# EAGLE board Myboard (EAGLE 8.2.2)
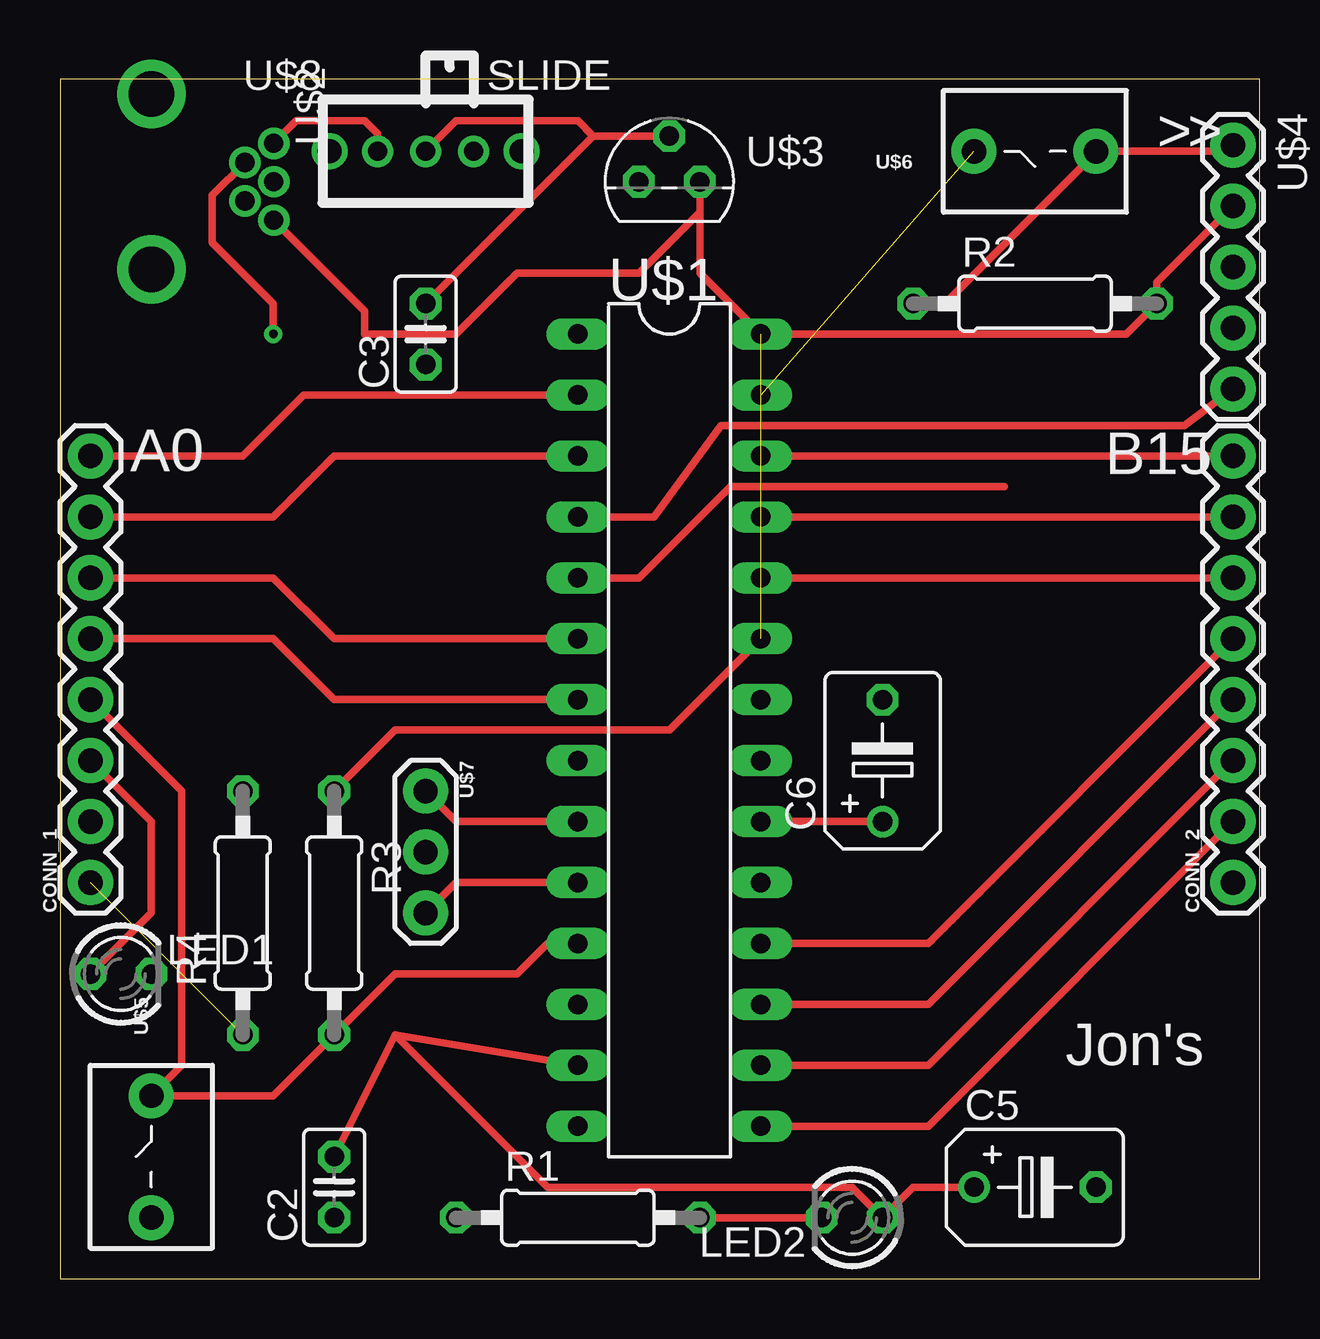
[diagram p0: board, top side]
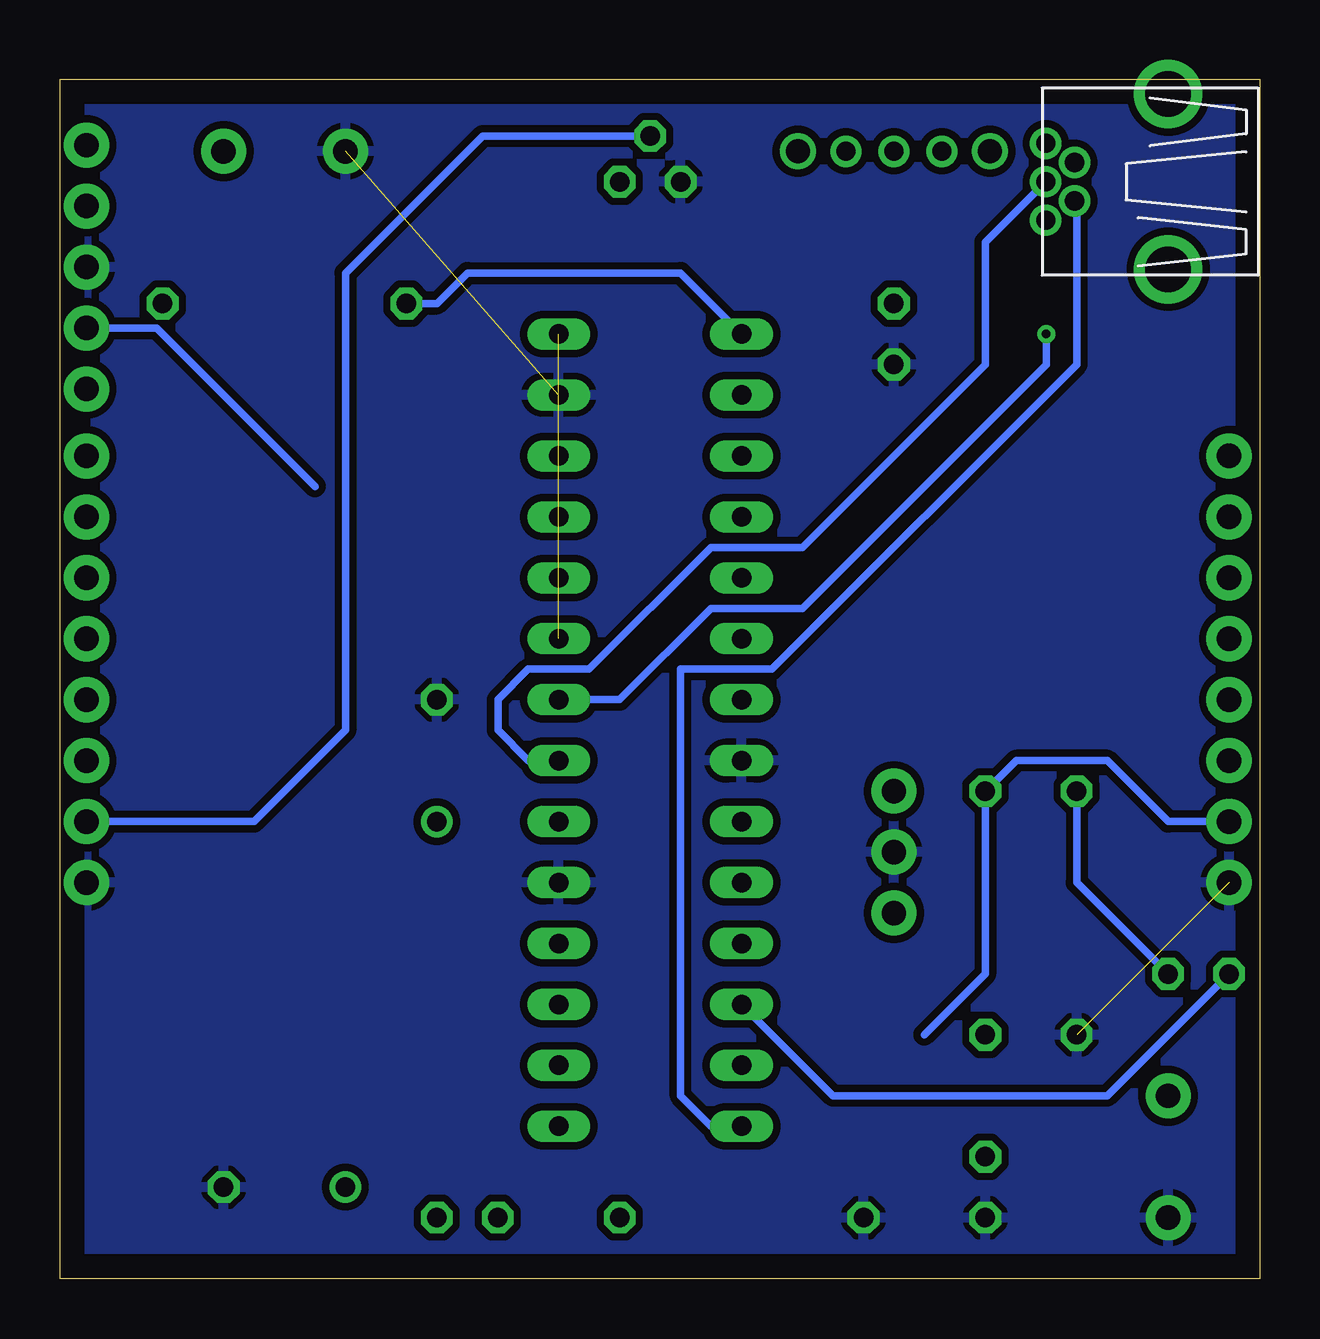
[diagram p1: board, bottom side, seen from below]

Size 50 x 50 mm. Coordinates in mm from the lower left corner, seen from the top.
Outline: 0,0 50,0 50,50 0,50 0,0
Copper layers (1*16): Top 0.035mm / dielectric 1.5mm / Bottom 0.035mm
Design rules "default": minimum track width 6mil, minimum drill 0.35mm, track to track 6mil, track to pad 6mil, pad to pad 6mil, via to via 6mil, smd to smd 6mil, copper to edge 40mil, drill to drill 6mil, minimum pad ring 10mil, minimum via ring 8mil, stop-mask expansion 4mil, vias tented up to drill 0mil, thermal gap 10mil

## Footprints (pad centres in the part's own frame; a part is rotated, then mirrored left to right if it is on the bottom)
C025-025X050 = drill 0.813 octagon: 1 -1.27,0; 2 1.27,0
B45181B = drill 0.813: + -2.54,0 | drill 0.813 octagon: - 2.54,0
1X08 = drill 1.016 pad 1.88: 1 0,0; 2 2.54,0; 3 5.08,0; 4 7.62,0; 5 10.16,0; 6 12.7,0; 7 15.24,0; 8 17.78,0
LED3MM = drill 0.813 octagon: A -1.27,0; K 1.27,0
0207/10 = drill 0.813 octagon: 1 -5.08,0; 2 5.08,0
DIL28-3 = drill 0.813 long: 1 -16.51,-3.81; 2 -13.97,-3.81; 3 -11.43,-3.81; 4 -8.89,-3.81; 5 -6.35,-3.81; 6 -3.81,-3.81; 7 -1.27,-3.81; 8 1.27,-3.81; 9 3.81,-3.81; 10 6.35,-3.81; 11 8.89,-3.81; 12 11.43,-3.81; 13 13.97,-3.81; 14 16.51,-3.81; 15 16.51,3.81; 16 13.97,3.81; 17 11.43,3.81; 18 8.89,3.81; 19 6.35,3.81; 20 3.81,3.81; 21 1.27,3.81; 22 -1.27,3.81; 23 -3.81,3.81; 24 -6.35,3.81; 25 -8.89,3.81; 26 -11.43,3.81; 27 -13.97,3.81; 28 -16.51,3.81
USB-MB-H = drill 0.8: D+ 5.1,0; D- 3.9,0.8; GND 5.1,-1.6; ID 3.9,-0.8; VBUS 5.1,1.6 | drill 1.9: P$6 0,-3.65; P$7 0,3.65
TO92 = drill 0.813 octagon: 1 -1.27,0; 2 0,1.905; 3 1.27,0
1X05 = drill 1.016 pad 1.88: 1 0,0; 2 2.54,0; 3 5.08,0; 4 7.62,0; 5 10.16,0
BUTTON = drill 1.016 pad 1.88: 1 -2.54,0; 2 2.54,0
OSC = drill 1.016 pad 1.88: 1 -2.54,0; 2 0,0; 3 2.54,0
SLIDE = drill 0.8: 1 -2,0; 2 0,0; 3 2,0 | drill 1: P$1 -4,0; P$2 4,0

## Placement (x,y rotation side)
C2  [C025-025X050]  11.43,3.81 90 top
C3  0.1  [C025-025X050]  15.24,39.37 90 top
C5  10  [B45181B]  40.64,3.81 0 top
C6  10  [B45181B]  34.29,21.59 90 top
CONN_1  [1X08]  1.27,16.51 90 top
CONN_2  [1X08]  48.9,16.51 90 top
LED1  [LED3MM]  2.54,12.7 0 top
LED2  [LED3MM]  33.02,2.54 180 top
R1  330  [0207/10]  21.59,2.54 0 top
R2  10k  [0207/10]  40.64,40.64 0 top
R3  10k  [0207/10]  11.43,15.24 270 top
R4  330  [0207/10]  7.62,15.24 90 top
U$1  PIC  [DIL28-3]  25.4,22.86 270 top
U$2  MYUSB  [USB-MB-H]  3.81,45.72 0 top
U$3  MCP1702  [TO92]  25.4,45.72 0 top
U$4  SWITCH_M05  [1X05]  48.9,47.24 270 top
U$5  BUTTON  [BUTTON]  3.81,5.08 90 top
U$6  BUTTON  [BUTTON]  40.64,46.99 180 top
U$7  OSC  [OSC]  15.24,17.78 270 top
U$8  SLIDE  [SLIDE]  15.24,46.99 0 top

## Library data of the parts
C2 C3 C5 C6 R1-R4 = resistor
CONN_1 CONN_2 = SparkFun-Connectors; PROD_ID: CONN-08438
LED1 LED2 U$3 U$4 = ME433C
U$1 U$2 = ME433
U$5-U$8 = ME433_2017_lib_mk2

## Nets
+3V3: C2.2 C5.+ CONN_1.2 LED2.A R2.2 R3.1 U$1.13 U$1.23 U$1.28 U$2.GND U$3.3 U$4.2
A0: CONN_1.8 U$1.2
A1: CONN_1.7 U$1.3
A4: CONN_1.3 LED1.A U$1.12
B0: U$1.4 U$4.5
B1: U$1.5 U$4.4
B2: CONN_1.6 U$1.6
B3: CONN_1.5 U$1.7
B4: CONN_1.4 R3.2 U$1.11 U$5.2
B5: U$1.14 U$2.ID
B7: CONN_2.3 U$1.16
B8: CONN_2.4 U$1.17
B9: CONN_2.5 U$1.18
B10: U$1.21 U$2.D+
B11: U$1.22 U$2.D-
B13: CONN_2.6 U$1.24
B14: CONN_2.7 U$1.25
B15: CONN_2.8 U$1.26
GND: C2.1 C3.1 C5.- C6.- CONN_1.1 CONN_2.1 R1.1 R4.1 U$1.8 U$1.19 U$1.27 U$3.1 U$4.3 U$5.1 U$6.2 U$7.2
MCLR: R2.1 U$1.1 U$4.1 U$6.1
N$4: C6.+ U$1.20
N$5: LED2.K R1.2
N$7: LED1.K R4.2
OSC1: U$1.9 U$7.1
OSC2: U$1.10 U$7.3
SW: U$2.VBUS U$8.1
VBUS: C3.2 CONN_2.2 U$1.15 U$3.2 U$8.2

## Tracks (layer width: path | path; a pad name or v marks a point on that pad's centre or on a via)
+3V3  (2 unrouted)
  Top 0.305: U$4.2 45.72,41.53 R2.2 44.45,39.37 U$1.28 26.67,41.91 U$3.3 26.67,44.45 24.13,41.91 19.05,41.91 16.51,39.37 12.7,39.37 12.7,40.33 U$2.GND | C2.2 13.97,10.16 | 13.97,10.16 U$1.13 | C5.+ 35.56,3.81 LED2.A 33.02,3.81 20.32,3.81 13.97,10.16 | R3.1 13.97,22.86 25.4,22.86 U$1.23
  Bottom 0.305: 11.43,20.3 R3.1 | 11.43,20.3 11.43,12.7 13.97,10.16 | CONN_1.2 3.81,19.05 6.35,21.59 10.14,21.59 11.43,20.3
A0
  Top 0.305: CONN_1.8 7.62,34.29 10.16,36.83 U$1.2
A1
  Top 0.305: CONN_1.7 8.89,31.75 11.43,34.29 U$1.3
A4
  Top 0.305: LED1.A 3.81,15.24 3.81,19.05 CONN_1.3
  Bottom 0.305: U$1.12 17.78,7.62 6.35,7.62 LED1.A
B0
  Top 0.305: U$4.5 46.86,35.56 27.55,35.56 24.75,31.75 U$1.4
B1  (1 unrouted)
  Top 0.305: U$1.5 24.13,29.21 27.94,33.02 39.37,33.02
  Bottom 0.305: U$4.4 45.97,39.62 39.37,33.02
B2
  Top 0.305: CONN_1.6 8.89,29.21 11.43,26.67 U$1.6
B3
  Top 0.305: CONN_1.5 8.89,26.67 11.43,24.13 U$1.7
B4
  Top 0.305: CONN_1.4 5.08,20.32 5.08,8.89 U$5.2 8.89,7.62 R3.2 13.97,12.7 19.05,12.7 20.32,13.97 U$1.11
B5
  Bottom 0.305: U$1.14 22.86,6.35 24.13,7.62 24.13,25.4 20.32,25.4 7.62,38.1 7.62,44.83 U$2.ID
B7
  Top 0.305: U$1.16 36.2,8.89 CONN_2.3
B8
  Top 0.305: U$1.17 36.2,11.43 CONN_2.4
B9
  Top 0.305: U$1.18 36.2,13.97 CONN_2.5
B10
  Bottom 0.305: U$1.21 30.48,21.59 31.75,22.86 31.75,24.13 30.48,25.4 27.94,25.4 22.86,30.48 19.05,30.48 11.43,38.1 11.43,43.2 U$2.D+
B11  (via drill 0.35)
  Top 0.305: v8.89,39.37 8.89,40.64 6.35,43.18 6.35,45.16 U$2.D-
  Bottom 0.305: U$1.22 26.67,24.13 22.86,27.94 19.05,27.94 8.89,38.1 v8.89,39.37
B13
  Top 0.305: U$1.24 CONN_2.6
B14
  Top 0.305: U$1.25 CONN_2.7
B15
  Top 0.305: U$1.26 CONN_2.8
GND  (2 unrouted)
  pour Bottom (isolate 0.305): 0,50.8 50.8,50.8 50.8,0 0,0
MCLR
  Top 0.305: 43.23,46.99 U$6.1 | 43.23,46.99 48.64,46.99 U$4.1 | R2.1 36.88,40.64 43.23,46.99
  Bottom 0.305: R2.1 34.29,40.64 33.02,41.91 24.13,41.91 U$1.1
N$4
  Top 0.305: U$1.20 C6.+
N$5
  Top 0.305: R1.2 LED2.K
N$7
  Bottom 0.305: R4.2 7.62,16.51 LED1.K
OSC1
  Top 0.305: U$7.1 16.51,19.05 U$1.9
OSC2
  Top 0.305: U$7.3 16.51,16.51 U$1.10
SW
  Top 0.305: U$8.1 13.24,47.72 12.7,48.26 9.85,48.26 U$2.VBUS
VBUS
  Top 0.305: U$1.15 36.2,6.35 CONN_2.2 | 22.23,47.62 U$3.2 22.23,47.62 | 22.23,47.62 21.59,48.26 16.51,48.26 U$8.2 | 22.23,47.62 C3.2
  Bottom 0.305: CONN_2.2 41.91,19.05 38.1,22.86 38.1,41.91 32.38,47.62 U$3.2

## Text on the board
tPlace: > | > | A0 | B15 | Jon's